# Altium PCB Sound.PcbDoc
Units mm, origin at the board's own origin, x right, y up, seen from the top; angles counter-clockwise.
Board outline 47.9 x 61.1 mm, 2 copper layers (TopLayer, BottomLayer); 16 components, 12 nets, 48 pads, 0 vias.
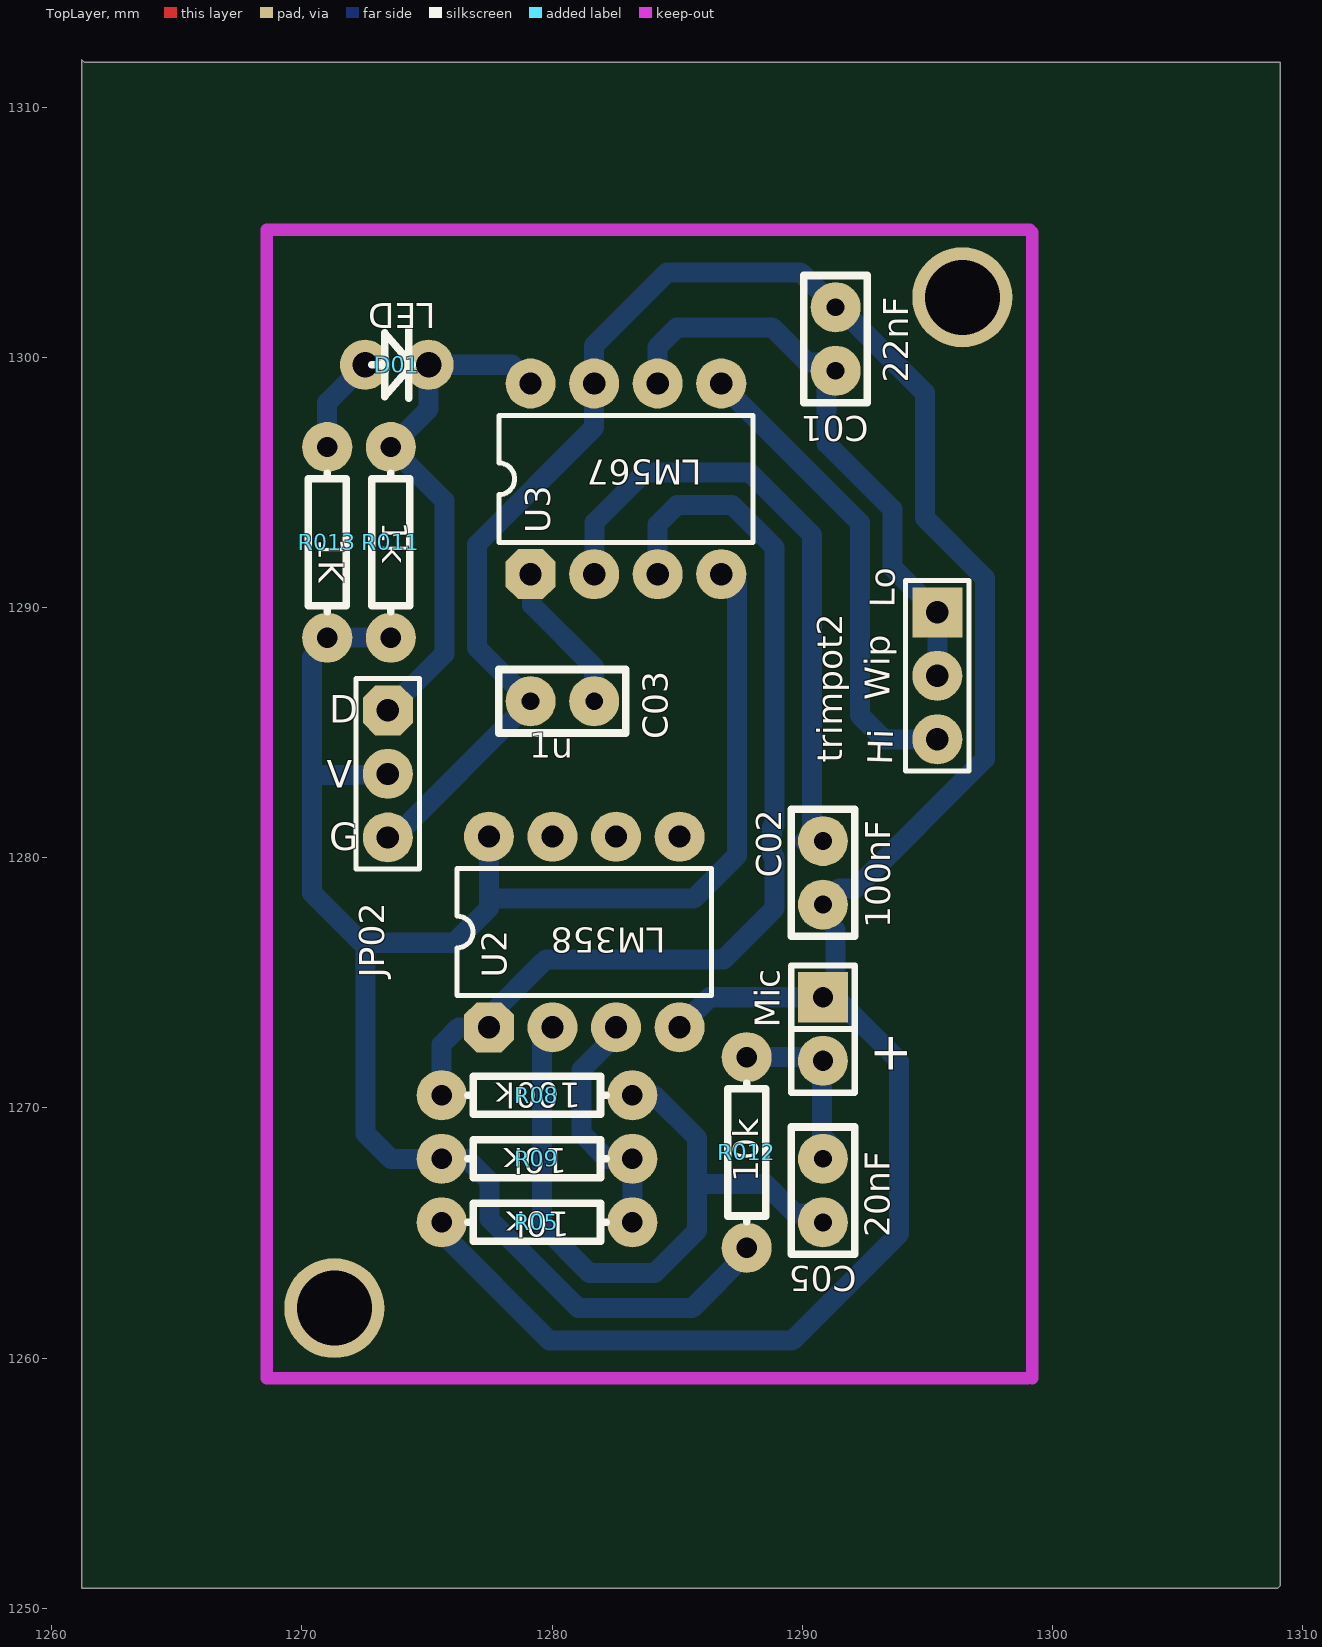
[diagram p0: TopLayer view]
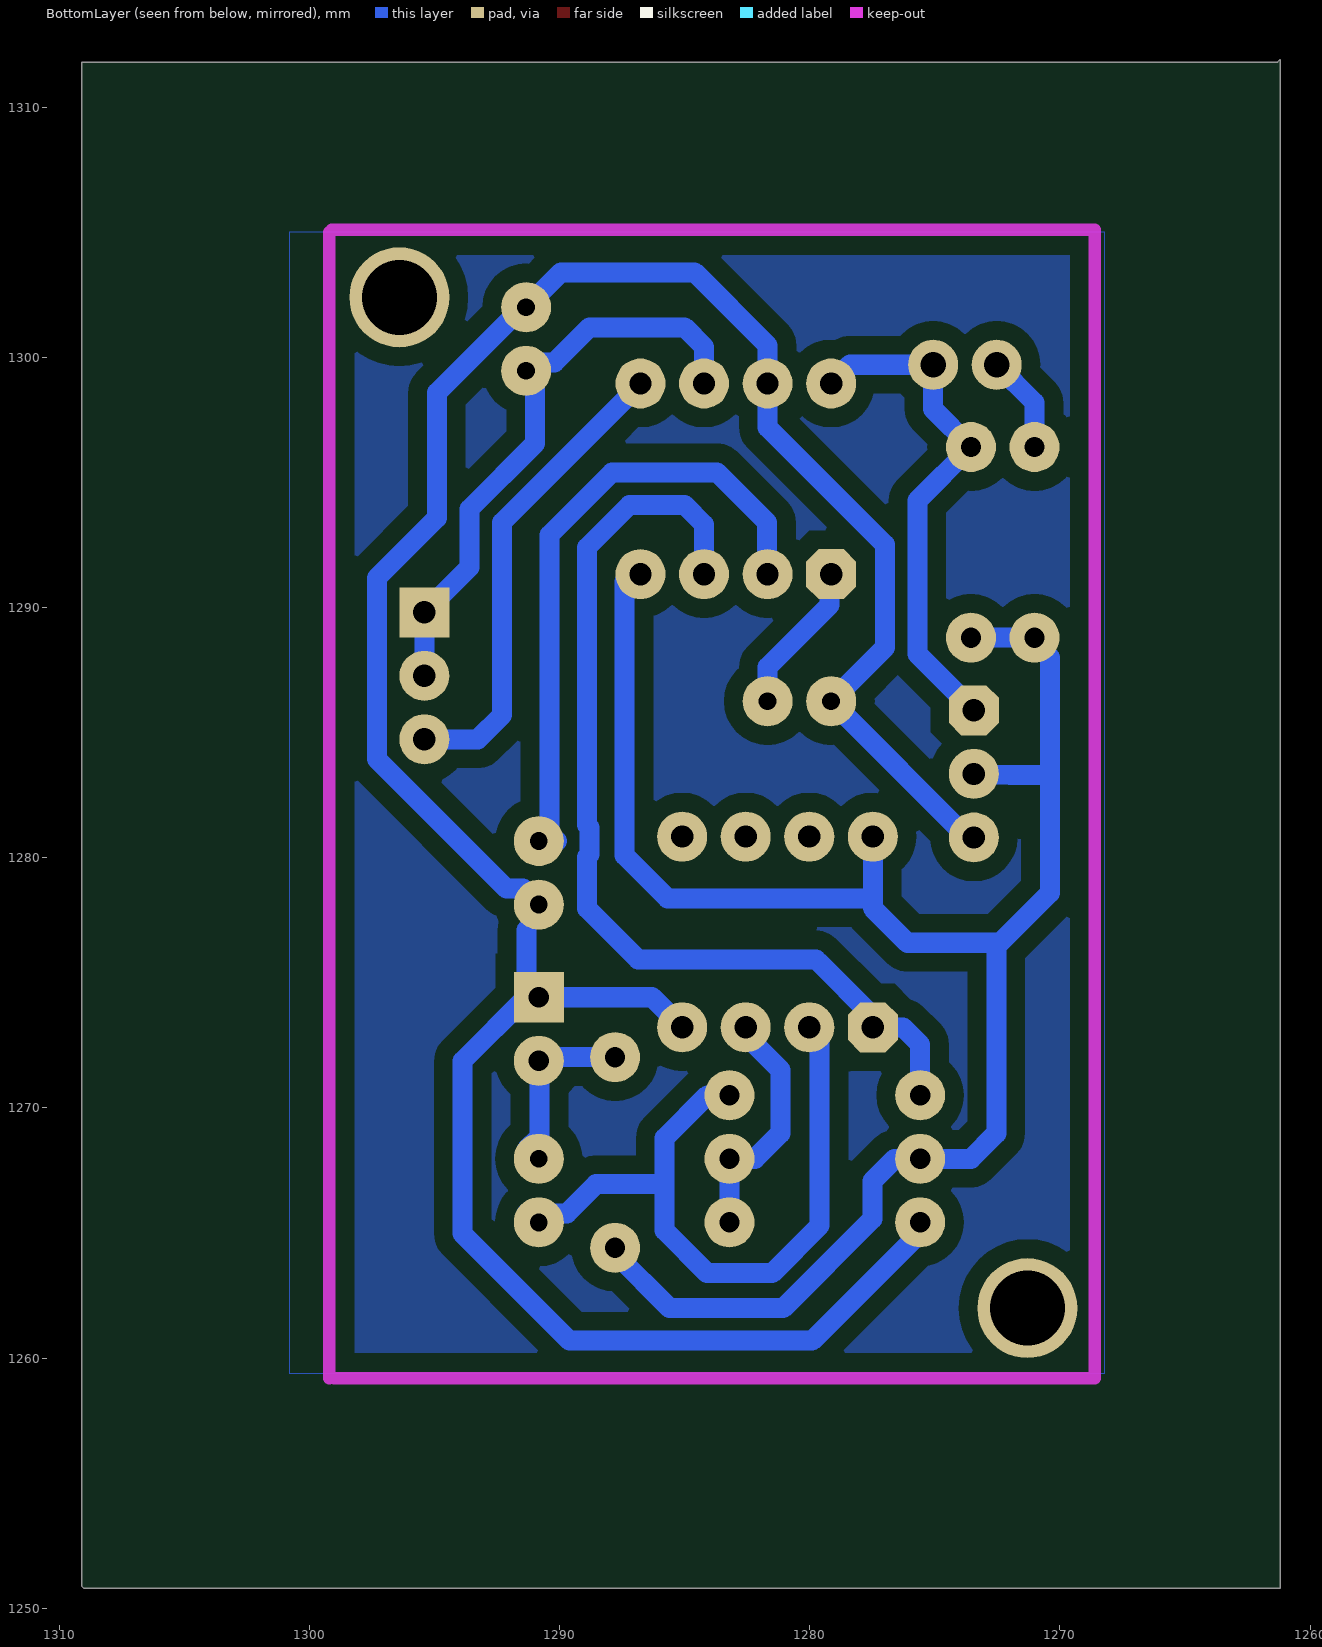
[diagram p1: BottomLayer view, seen from below]

## Layer stack, top to bottom
TopLayer: signal copper 0.0356
Dielectric: core 0.32, FR-4, Dk 4.8
BottomLayer: signal copper 0.0356

## Board outline
1261.2,1311.9 1261.3,1311.8 1309.1,1311.8 1309.1,1250.9 1309,1250.8 1261.2,1250.8 1261.2,1311.9

## Design rules (kind name [scope] priority, off if disabled: settings)
Clearance Clearance_8 [InNamedPolygon('Top Layer-No Net')] p1: gap=0.8
Clearance Clearance_7 [InNamedPolygon('Top Layer-No Net')] p2: gap=1
Clearance Clearance_6 [InNamedPolygon('Top Layer-No Net')] p3: gap=0.254
Clearance Clearance_5 [InNamedPolygon('Top Layer-No Net')] p4: gap=0.7
Clearance Clearance_4 [InNamedPolygon('Top Layer-No Net')] p5: gap=0.6
Clearance Clearance_3 [InNamedPolygon('Top Layer-No Net')] p6: gap=0.5
Clearance Clearance_2 [InNamedPolygon('Top Layer-No Net')] p7: gap=0.8
Clearance Clearance_1 [InNamedPolygon('Top Layer-No Net')] p8: gap=0.3
Clearance [All] p9: gap=0.5
FabricationTestPointUsage TestPointUsage [All] p1: valid=0 allowmultiple=FALSE
FabricationTestpoint Testpoint [All] p1: side=3 testpointundercomponent=TRUE minsize=1.016 maxsize=2.54 preferedsize=1.524 minholesize=0.508 maxholesize=1.016 preferedholesize=0.813 testpointgrid=0.025 allowsidetop=TRUE allowsidebottom=TRUE usegrid=TRUE gridtolerance=0
PasteMaskExpansion PasteMaskExpansion_1 [All] p2: expansion=0
PlaneClearance PlaneClearance_1 [All] p1: clearance=0.508
PlaneClearance [All] p2: clearance=0.254
PlaneConnect PlaneConnect_1 [All] p2: planeconnectstyle=Relief reliefexpansion=0.508 reliefentries=4 reliefconductorwidth=0.254 reliefairgap=0.254
PolygonConnect [All] p1: connectstyle=Relief reliefconductorwidth=0.254 reliefentries=4 polygonreliefangle="90 Angle"
RoutingLayers [All] p1: top layer_v5=FALSE bottom layer_v5=TRUE
RoutingVias [All] p1: holewidth=0.8 width=1.3 viastyle="Through Hole" minholewidth=0.8 minwidth=1.3 maxholewidth=0.8 maxwidth=1.3
ShortCircuit ShortCircuit_1 [All] p2: allowed=FALSE
SilkscreenOverComponentPads [All] p1: minsilkscreentomaskgap=0.254
SolderMaskExpansion SolderMaskExpansion_1 [All] p1: expansion=0.102
SolderMaskExpansion [All] p2: expansion=0.051
UnRoutedNet UnRoutedNet_1 [All] p2:
Width [All] p1: maxlimit=0.8 minlimit=0.3 preferedwidth=0.8 toplayer_maxwidth=0.6 toplayer_prefwidth=0.5 bottomlayer_minwidth=0.8 minimp=50.000000 maximp=50.000000 favimp=50.000000
23 further rules are at their usual default settings.

## Components (designator, comment, footprint, x,y, rotation, side; value= is the part's Value field where it differs from the comment)
C01 "22nF" RAD-0.1 1291.336,1299.464 r90 top
C02 "100nF" RAD-0.1 1290.828,1278.128 r90 top
C03 "1u" RAD-0.1 1279.144,1286.256 r0 top
C05 "20nF" RAD-0.1 1290.828,1265.428 r90 top
D01 "LED" DIODAKU 1273.556,1299.464 r90 top
JP02 "HEADER 3" HDR1X3#1 1273.439,1285.893 r270 top
Mic "" SIP-2 1290.828,1274.425 r270 top
R05 "10k" AXIAL-0.3 1283.208,1265.428 r180 top
R08 "100k" AXIAL-0.3 1283.208,1270.508 r180 top locked
R09 "10k" AXIAL-0.3 1275.588,1267.968 r0 top
R011 "1k" AXIAL-0.3 1273.556,1296.416 r270 top
R012 "10k" AXIAL-0.3 1287.78,1264.412 r90 top locked
R013 "1K" AXIAL-0.3 1271.016,1296.416 r270 top
trimpot2 "Header 3" HDR1X3#2 1295.4,1289.812 r270 top (schematic designator DigPOT)
U2 "LM358" DIP-8 1277.479,1273.225 r90 top
U3 "LM567" DIP-8 1279.144,1291.336 r90 top

## Footprints (in the part's own frame and the unit in brackets; to place one, negate y for a bottom-side part, rotate by r counter-clockwise, add the part's x,y. Pads: shape width x height; smd on the part's side, far side on the other; paste and mask are expansions set on the pad)
AXIAL-0.3 [mm]
  round 2 hole 0.813 mask+0.102: 1(0,0) 2(7.62,0)
  silkscreen extent 1.04,-0.76 6.58,0.76
DIODAKU [mil]
  round 78.74 hole 40 mask+4: A(9.5,40.5) K(9.5,-59.5)
  silkscreen extent -44,-34 66,30
DIP-8 [mm]
  oct 2x2 hole 0.889 mask+0.102: 1(0,0)
  round 2 hole 0.889 mask+0.102: 2(0,-2.54) 3(0,-5.08) 4(0,-7.62) 5(7.62,-7.62) 6(7.62,-5.08) 7(7.62,-2.54) 8(7.62,0)
  silkscreen extent 1.27,-8.89 6.35,1.27
HDR1X3#1 [mm]
  oct 2x2 hole 0.889 mask+0.102: 1(0,0)
  round 2 hole 0.889 mask+0.102: 2(2.54,0) 3(5.08,0)
  silkscreen extent -1.27,-1.27 6.35,1.27
HDR1X3#2 [mm] "Connector; Header; 3 Position"
  rect 2x2 hole 0.9: 1(0,0)
  round 2 hole 0.9: 2(2.54,0) 3(5.08,0)
  silkscreen extent -1.27,-1.27 6.35,1.27
RAD-0.1 [mm]
  round 2 hole 0.711 mask+0.102: 1(0,0) 2(2.54,0)
  silkscreen extent -1.27,-1.27 3.81,1.27
SIP-2 [mm] "Connector; Header; 2 Position"
  rect 2x2 hole 0.813 mask+0.102: 1(0,0)
  round 2 hole 0.813 mask+0.102: 2(2.54,0)
  silkscreen extent -1.27,-1.27 3.81,1.27

## Part data
C01 C02 C03 C05: library part CAP, "Capacitor"
JP02: library part CON3, "Connector"
Mic: library part "Header 2", "Header, 2-Pin"
R05 R08 R09 R011 R012 R013: library part RES1
trimpot2: "Header, 3-Pin"
U2: "Fast Settling Dual Operational Amplifier"

## Free pads (board coordinates)
  round 4 hole 3 mask+0.102: 0(1271.3,1262) 0(1296.4,1302.4)

## Nets (pads, with @x,y where several pads share a name; then routed paths per layer and width w, separated by ;. In a path a pad name is that pad's centre, name@x,y a point inside that pad or via, vN(x,y) a via of type N, cw(c..) or ccw(c..) an arc to the next point about the centre after c; other vN are vias at no path point)
GND: C01.2 C02.1 C03.1 JP02.3 Mic.1 R05.2 U2.4 U3.7 | length 108.7
  BottomLayer w0.8: JP02.3@1273.57,1280.682 C03.1 1277,1288.4 1277,1292.52 1281.684,1297.204 U3.7 1281.684,1300.484 1284.6,1303.4 1289.94,1303.4 C01.2 1291.483,1302.004 1294.9,1298.587 1294.9,1293.585 1297.3,1291.185 1297.3,1283.945 1292.123,1278.768 1291.468,1278.768 C02.1 ; R05.2 1275.588,1265.012 1279.9,1260.7 1289.6,1260.7 1293.876,1264.976 1293.876,1266.276 1293.876,1271.875 Mic.1@1291.325,1274.425 ; U2.4 1286.299,1274.425 Mic.1@1291.325,1274.425 ; C02.1@1290.32,1278.128 C02.1@1290.774,1277.674 ; 1291.325,1277.123 Mic.1@1291.325,1274.425
NetC01_1: C01.1 trimpot2.1 trimpot2.2 U3.6 | length 23.8
  BottomLayer w0.8: U3.6 1284.224,1300.424 1285,1301.2 1288.8,1301.2 1290.2,1299.8 1291,1299.8 C01.1 1290.971,1299.099 1290.971,1296.567 1293.6,1293.938 1293.6,1291.612 trimpot2.1 trimpot2.2
NetC02_2: C02.2 U3.2 | length 25
  BottomLayer w0.8: U3.2 1281.7,1291.352 1281.7,1293.4 1283.7,1295.4 1287.9,1295.4 1290.4,1292.9 1290.4,1280.968 C02.2@1290.1,1280.668
NetC03_2: C03.2 U3.1 | length 6.7
  BottomLayer w0.8: U3.1@1279.2,1291.9 1279.2,1290.1 1281.684,1287.616 C03.2
NetC05_1: C05.1 R08.1 U2.2 | length 28.8
  BottomLayer w0.8: U2.2 1279.6,1272.806 1279.6,1265.3 1281.5,1263.4 1284.1,1263.4 1285.8,1265.1 1285.8,1268.8 1284.092,1270.508 R08.1 ; 1285.8,1266.952 1288.542,1266.952 1289.705,1265.789 C05.1@1291.325,1265.789
NetD01_A: D01.A R013.1 | length 4.1
  BottomLayer w0.8: R013.1 1271.016,1298.194 D01.A D01.A@1272.527,1299.852
NetD01_K: D01.K JP02.1 R011.1 U3.8 | length 21.4
  BottomLayer w0.8: JP02.1@1274,1286.454 JP02.1 1275.7,1288.154 1275.7,1294.272 R011.1 1275.067,1297.927 D01.K 1278.395,1299.705 U3.8
NetMic_2: C05.2 Mic.2 R012.2 | length 7.6
  BottomLayer w0.8: R012.2 1291.179,1272.032 1291.325,1271.885 1290.8,1271.36 1290.8,1268.855 C05.2@1291.325,1268.329
NetR09_2: R05.1 R09.2 U2.3 | length 9.8
  BottomLayer w0.8: U2.3 1282.559,1272.907 1281.176,1271.524 1281.176,1268.984 1282.192,1267.968 R09.2 R05.1
NetU2_1: R08.2 U2.1 U3.3 | length 39.9
  BottomLayer w0.8: R08.2 1275.588,1272.54 1276.273,1273.225 U2.1 1277.479,1273.669 1279.652,1275.842 ; 1279.751,1275.941 1286.863,1275.941 1288.9,1277.978 1288.9,1280.03 1288.8,1280.13 1288.8,1281.206 1288.9,1281.306 1288.9,1292.4 1287.2,1294.1 1285,1294.1 1284.224,1293.324 U3.3
NetU3_5: trimpot2.3 U3.5 | length 19.1
  BottomLayer w0.8: U3.5 1286.764,1298.936 1292.3,1293.4 1292.3,1285.7 1293.268,1284.732 trimpot2.3
VCC: JP02.2 R09.1 R011.2 R012.1 R013.2 U2.8 U3.4 | length 77.2
  BottomLayer w0.8: JP02.2 1272,1283.3 1270.5,1283.3 1270.4,1283.2 ; R011.2 1271.196,1288.796 1270.4,1288 1270.4,1283.2 ; U2.8 1277.479,1277.987 1276.096,1276.604 1272.54,1276.604 ; 1277.62,1278.382 1285.682,1278.382 1287.4,1280.1 1287.4,1291.036 U3.4@1287.1,1291.336 ; R012.1@1287.78,1264.666 1287.78,1264.18 1285.6,1262 1281.062,1262 1277.5,1265.562 1277.5,1267.072 1276.604,1267.968 R09.1 1273.556,1267.968 1272.54,1268.984 1272.54,1276.604 ; 1270.4,1283.2 1270.4,1278.6 1272.396,1276.604 1272.54,1276.604
pads on no net: U2.5 U2.6 U2.7

## Polygon pours and split planes (outlines as drawn)
no net on BottomLayer "Top Layer-No Net" (solid, shelved, pour order 1000): 1268.2,1305 1300.8,1305 1300.8,1259.4 1268.2,1259.4 1268.2,1305
no net on BottomLayer "Bottom Layer-No Net" (solid, pour order 1000): 1268.6,1305 1299.2,1305 1299.2,1259.5 1268.7,1259.5 1268.6,1259.4

## Keep-outs
KeepOutLayer:
  lines w0.5: 1268.6,1305 1268.6,1259.2 1299,1259.2 ; 1268.6,1305.1 1299.1,1305.1 ; 1299.2,1259.2 1299.2,1305

## Silkscreen, mask and mechanical layers (free items; w line width, h text height)
TopOverlay:
  text "Lo" at 1293.7,1290 h1 r89.55
  text "Wip" at 1293.5,1286.3 h1 r90
  text "D" at 1271.1,1285.4 h1.1
  text "Hi" at 1293.6,1283.7 h1 r88.15
  text "V" at 1271,1282.8 h1.1
  text "G" at 1271.1,1280.3 h1.1
  text "+" at 1294.2,1271.3 h1.52 r90